# Altium PCB Bottom_boaard.PcbDoc
Units mm, origin at the board's own origin, x right, y up, seen from the top; angles counter-clockwise.
Board outline 102.5 x 86.6 mm, 2 copper layers (Top Layer, Bottom Layer); 42 components, 42 nets, 163 pads, 28 vias.
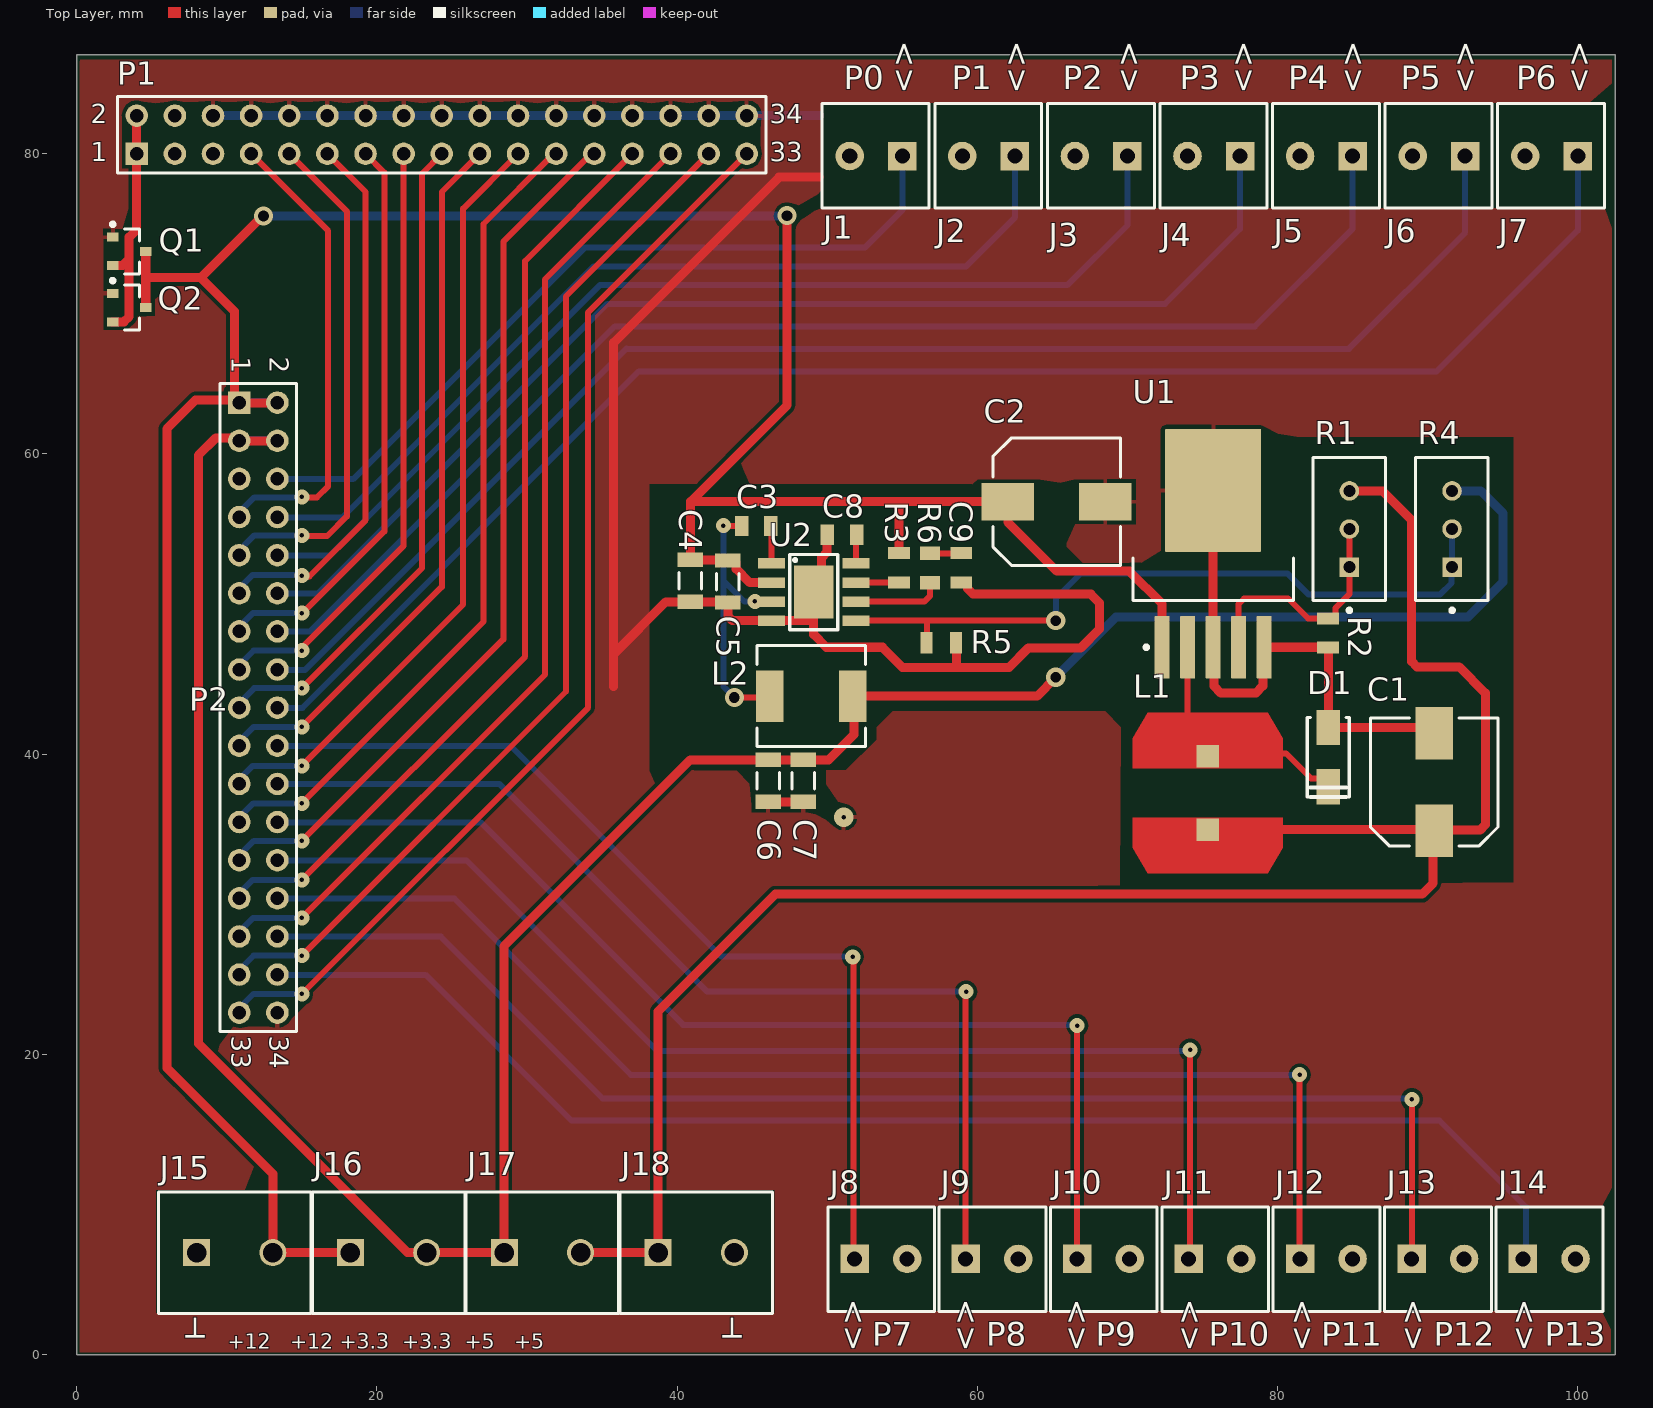
[diagram p0: Top Layer view]
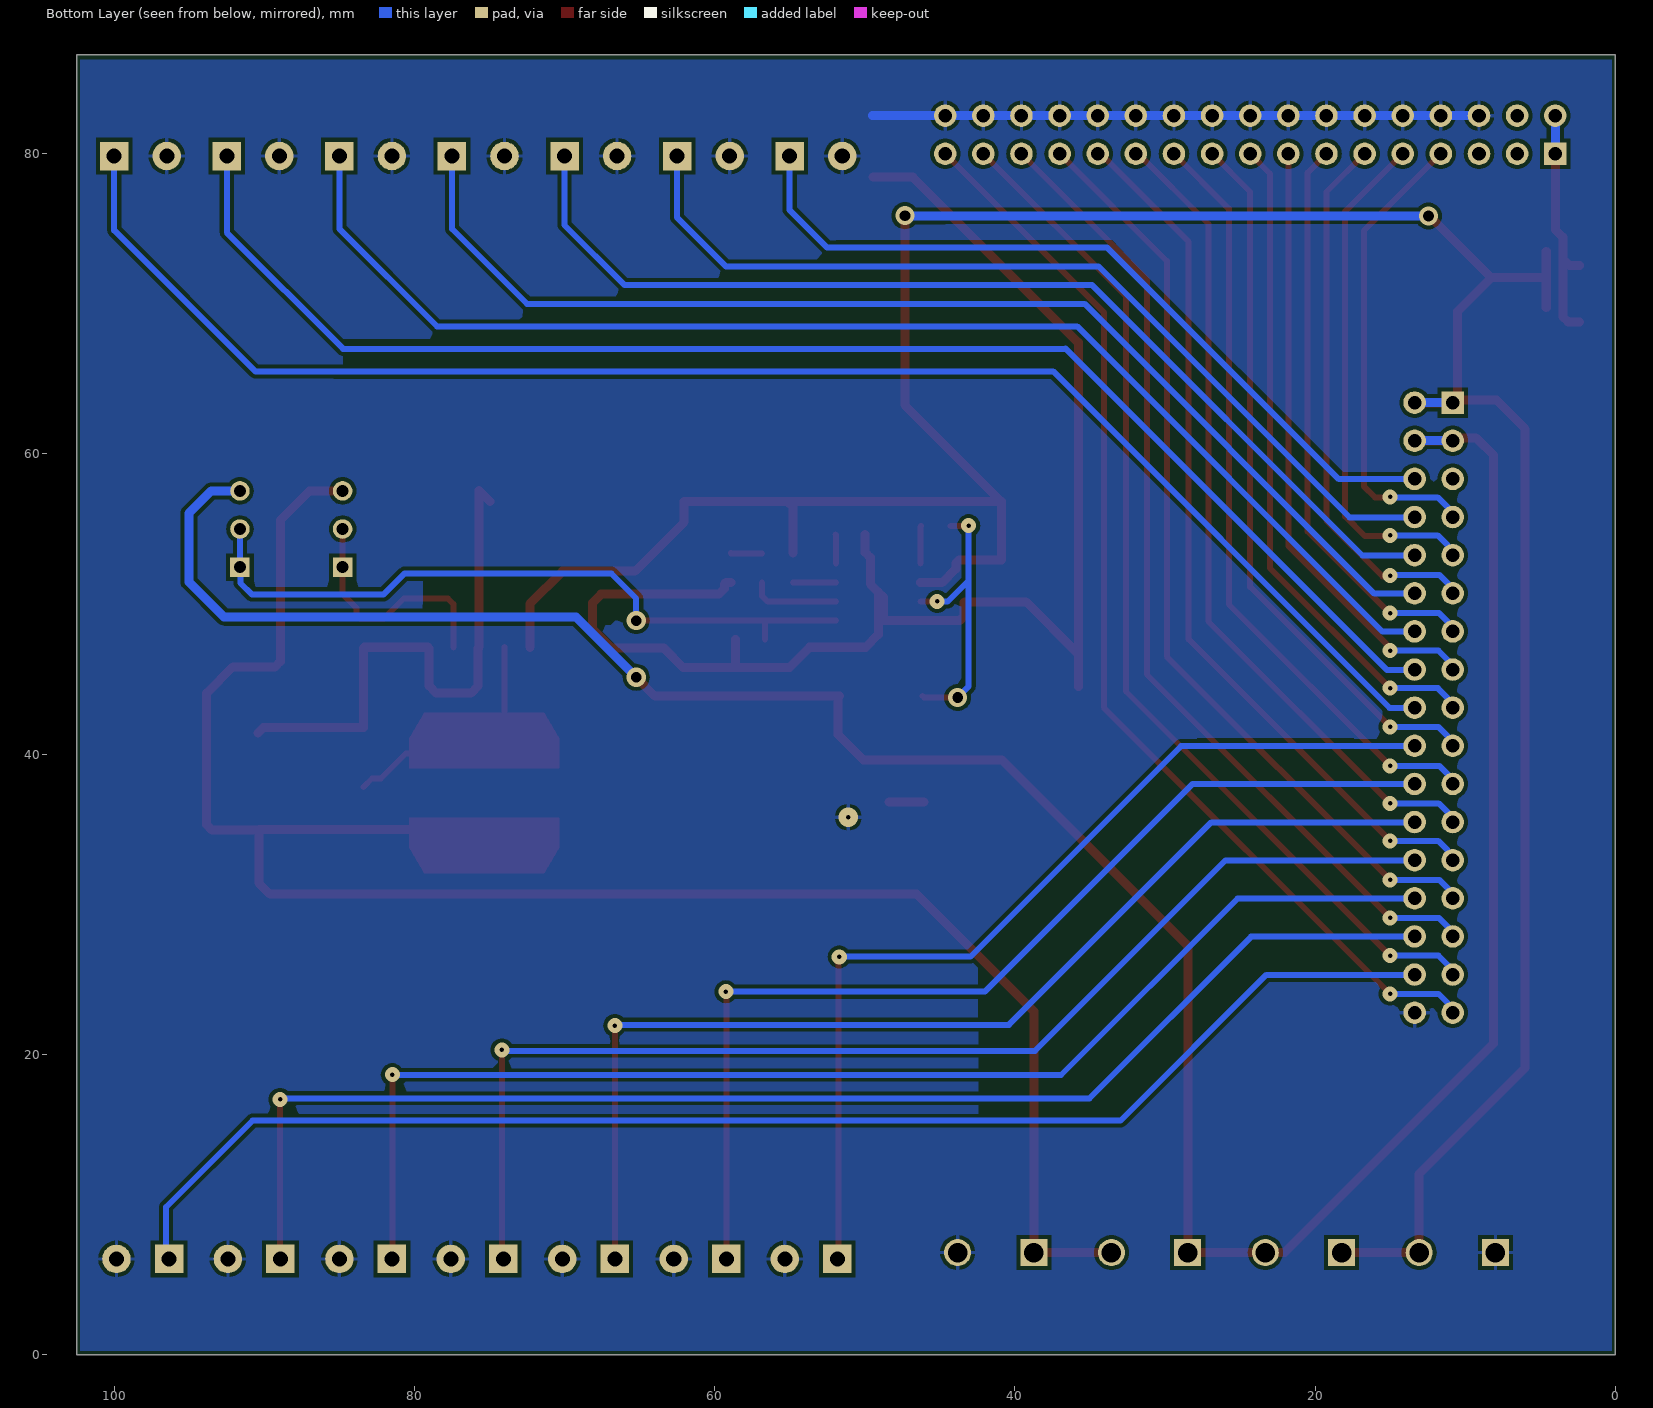
[diagram p1: Bottom Layer view, seen from below]
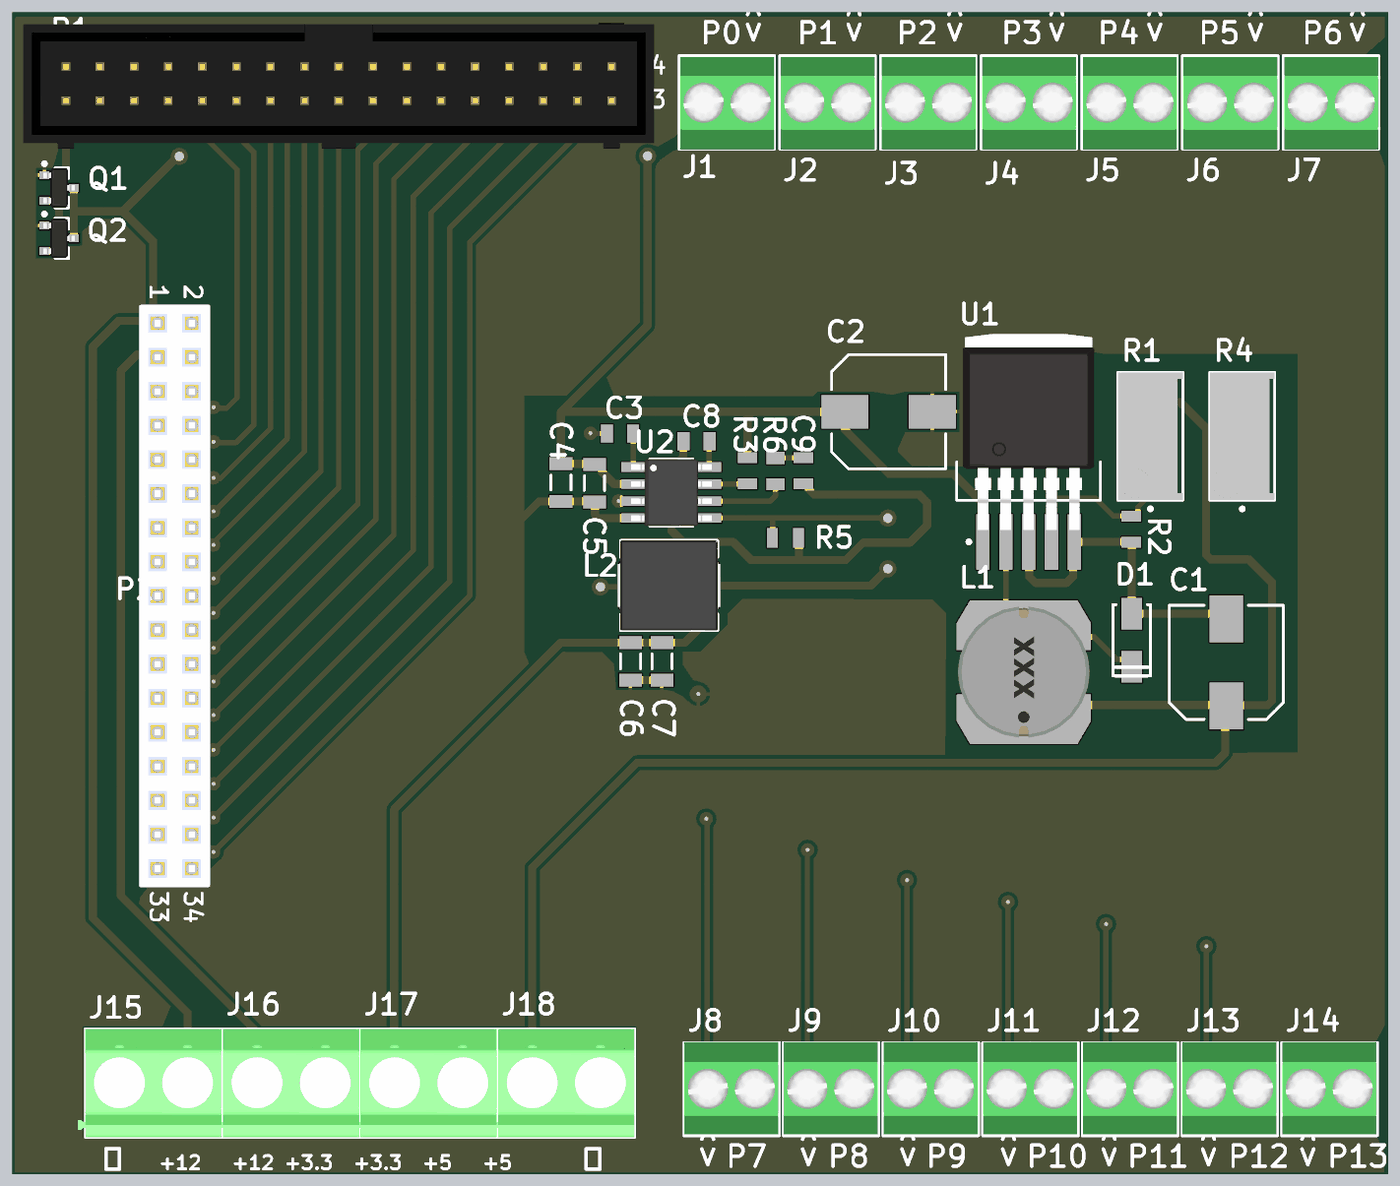
[diagram p2: 3D render of the assembled board from above, using the file's embedded part models]

## Layer stack, top to bottom
Top Solder: solder mask 0.0102, Solder Resist, Dk 3.5
Top Layer: signal copper 0.0356
Dielectric 1: dielectric 0.32, FR-4, Dk 4.8
Bottom Layer: signal copper 0.0356
Bottom Solder: solder mask 0.0102, Solder Resist, Dk 3.5

## Board outline
0,0 102.5,0 102.5,86.6 0,86.6

## Design rules (kind name [scope] priority, off if disabled: settings)
Clearance [All] p1: gap=0.254 ignorepadtopadclearanceinfootprint=FALSE except(0: Arc-Hole Track-Hole SMDPad-Hole THPad-Hole Via-Hole Fill-Hole Poly-Hole Region-Hole Text-Hole)
PolygonConnect [All] p1: connectstyle=Relief reliefconductorwidth=0.254 reliefentries=4 polygonreliefangle="90 Angle" airgapwidth=0.254
RoutingVias [All] p1: holewidth=0.711 width=1.27 viastyle="Through Hole" minholewidth=0.711 minwidth=1.27 maxholewidth=0.711 maxwidth=1.27
SolderMaskExpansion [All] p1: expansion=0.102
Width VCC [InNet('VCC')] p1: maxlimit=1 minlimit=0.6 preferedwidth=0.8 minimp=50.000000 maximp=50.000000 favimp=50.000000
Width +5 [InNet('+5')] p2: maxlimit=1 minlimit=0.6 preferedwidth=0.8 minimp=50.000000 maximp=50.000000 favimp=50.000000
Width +3.3 [InNet('+3.3')] p3: maxlimit=1 minlimit=0.6 preferedwidth=0.8 minimp=50.000000 maximp=50.000000 favimp=50.000000
Width +12 [InNet('+12')] p4: maxlimit=1 minlimit=0.6 preferedwidth=0.8 minimp=50.000000 maximp=50.000000 favimp=50.000000
Width GND [InNet('GND')] p5: maxlimit=1 minlimit=0.6 preferedwidth=0.8 minimp=50.000000 maximp=50.000000 favimp=50.000000
Width Width_1 [All] p6: maxlimit=0.4 minlimit=0.254 preferedwidth=0.3 minimp=50.000000 maximp=50.000000 favimp=50.000000
30 further rules are at their usual default settings.

## Classes and differential pairs
component class Power: C1 C2 C3 C4 C5 C6 C7 C8 C9 D1 L1 L2 Q1 Q2 R1 R2 R3 R4 R5 R6 U1 U2
component class Bottom_board: J1 J2 J3 J4 J5 J6 J7 J8 J9 J10 J11 J12 J13 J14 J15 J16 J17 J18 P1 P2

## Components (designator, comment, footprint, x,y, rotation, side; value= is the part's Value field where it differs from the comment)
C1 "CAP_ELEC_SMD" ECAP_SMD_8mmx10mm 90.434,38.15 r90 top
C2 "CAP_ELEC_SMD" ECAP_SMD_8mmx10mm 65.284,56.825 r0 top
C3 "CAP_SMD" CAP0805 45.275,55.2 r180 top
C4 "CAP_SMD" CAPC1206(3216)170_L 40.875,51.55 r90 top
C5 "CAP_SMD" CAPC1206(3216)170_L 43.375,51.5 r90 top
C6 "CAP_SMD" CAPC1206(3216)170_L 46.055,38.225 r90 top
C7 "CAP_SMD" CAPC1206(3216)170_L 48.4,38.225 r90 top
C8 "CAP_SMD" CAP0805 50.975,54.625 r0 top
C9 "CAP_SMD" CAP0805 56.85,52.4 r270 top
D1 "SS34" DO-214 83.384,39.8 r90 top
J1 "" KF350-3.5-02P 55,79.85 r180 top
J2 "" KF350-3.5-02P 62.5,79.85 r180 top
J3 "" KF350-3.5-02P 70,79.85 r180 top
J4 "" KF350-3.5-02P 77.5,79.85 r180 top
J5 "" KF350-3.5-02P 85,79.85 r180 top
J6 "" KF350-3.5-02P 92.5,79.85 r180 top
J7 "" KF350-3.5-02P 100,79.85 r180 top
J8 "" KF350-3.5-02P 51.825,6.375 r0 top
J9 "" KF350-3.5-02P 59.225,6.375 r0 top
J10 "" KF350-3.5-02P 66.65,6.375 r0 top
J11 "" KF350-3.5-02P 74.075,6.375 r0 top
J12 "" KF350-3.5-02P 81.5,6.375 r0 top
J13 "" KF350-3.5-02P 88.925,6.375 r0 top
J14 "" KF350-3.5-02P 96.35,6.375 r0 top
J15 "" PHOE-1729128-2_V 10.525,6.8 r0 top
J16 "" PHOE-1729128-2_V 20.775,6.8 r0 top
J17 "" PHOE-1729128-2_V 31.025,6.8 r0 top
J18 "" PHOE-1729128-2_V 41.275,6.8 r0 top
L1 "" SDR1006_SMD 75.35,37.425 r0 top
L2 "Inductor power" IHLP2525 48.925,43.875 r0 top value=10uH
P1 "Header 17X2" HDR2X17 4,80 r0 top
P2 "Header 17X2" HDR2X17-PBD 12.1,43.1 r270 top
Q1 "IRLML2502" SOT23_L 3.5,73.5 r0 top
Q2 "IRLML2502" SOT23_L 3.5,69.75 r0 top
R1 "3296W" BOUR-3296W 84.784,55 r90 top value=10K
R2 "RES_SMD" RES0805 83.359,48.075 r90 top
R3 "RES_SMD" RES0805 54.775,52.425 r90 top
R4 "3296W" BOUR-3296W 91.625,55 r90 top value=10K
R5 "RES_SMD" RES0805 57.6,47.425 r180 top
R6 "RES_SMD" RES0805 58.925,52.425 r90 top
U1 "LM2596SX-ADJ" KTT0005B_N 75.709,53.375 r90 top
U2 "MP2307" SOIC8N 49.1,50.8 r0 top

## Footprints (in the part's own frame and the unit in brackets; to place one, negate y for a bottom-side part, rotate by r counter-clockwise, add the part's x,y. Pads: shape width x height; smd on the part's side, far side on the other; paste and mask are expansions set on the pad)
BOUR-3296W [mm] "THD, 3-Leads, Body 9.53x4.83mm, Pitch 2.54mm"
  rect 1.3x1.3 hole 0.8: 1(-2.54,0)
  round 1.3 hole 0.8: 2(0,0) 3(2.54,0)
  silkscreen extent -5.54,-2.41 4.77,2.42, body extent -4.76,-2.4 4.76,2.42, height 11.55
CAP0805 [mm] "Chip Capacitor, 2-Leads, Body 2,00x1,20mm, IPC Medium Density"
  rect 0.9x1.35 smd: 1(-0.975,0) 2(0.975,0)
  body extent -1,-0.6 1,0.6, height 0.4
CAPC1206(3216)170_L [mm] "Chip Capacitor, Body 3.2x1.6mm, Height 1.7mm, IPC High Density"
  rect 0.95x1.7 smd: 1(-1.4,0) 2(1.4,0)
  silkscreen extent -0.55,-0.75 0.55,0.75, body extent -1.7,-0.9 1.7,0.9, height 1.7
DO-214 [mm] "Molded Diode, 2-Leads, Body 5,10x2,67mm, IPC Medium Density"
  rect 2.35x1.55 smd: 1(-1.975,0) 2(1.975,0)
  silkscreen extent -2.65,-1.4 2.65,1.4, body extent -2.64,-1.4 2.64,1.39, height 2.2
ECAP_SMD_8mmx10mm [mm] "Aluminum Electrolytic Capacitor, Diameter 8mm, Height 10.8mm, Pitch 6.5mm"
  rect 3.5x2.5 smd: 1(-3.25,0) 2(3.25,0)
  silkscreen extent -4.25,-4.25 4.25,4.25, body extent -3.99,-3.97 3.99,4, height 10.8
HDR2X17 [mm] "Connector; Header; 17x2 Position"
  rect 1.5x1.5 hole 0.9: 1(0,0)
  round 1.5 hole 0.9: 2(0,2.54) 3(2.54,0) 4(2.54,2.54) 5(5.08,0) 6(5.08,2.54) 7(7.62,0) 8(7.62,2.54) 9(10.16,0) 10(10.16,2.54) 11(12.7,0) 12(12.7,2.54) 13(15.24,0) 14(15.24,2.54) 15(17.78,0) 16(17.78,2.54) 17(20.32,0) 18(20.32,2.54) 19(22.86,0) 20(22.86,2.54) 21(25.4,0) 22(25.4,2.54) 23(27.94,0) 24(27.94,2.54) 25(30.48,0) 26(30.48,2.54) 27(33.02,0) 28(33.02,2.54) 29(35.56,0) 30(35.56,2.54) 31(38.1,0) 32(38.1,2.54) 33(40.64,0) 34(40.64,2.54)
  silkscreen extent -1.27,-1.27 41.91,3.81, body extent -3.17,-3.56 43.82,5.81, height 9.27
HDR2X17-PBD [mm] "Connector; Header; 17x2 Position"
  rect 1.5x1.5 hole 0.9: 1(-20.32,-1.27)
  round 1.5 hole 0.9: 2(-20.32,1.27) 3(-17.78,-1.27) 4(-17.78,1.27) 5(-15.24,-1.27) 6(-15.24,1.27) 7(-12.7,-1.27) 8(-12.7,1.27) 9(-10.16,-1.27) 10(-10.16,1.27) 11(-7.62,-1.27) 12(-7.62,1.27) 13(-5.08,-1.27) 14(-5.08,1.27) 15(-2.54,-1.27) 16(-2.54,1.27) 17(0,-1.27) 18(0,1.27) 19(2.54,-1.27) 20(2.54,1.27) 21(5.08,-1.27) 22(5.08,1.27) 23(7.62,-1.27) 24(7.62,1.27) 25(10.16,-1.27) 26(10.16,1.27) 27(12.7,-1.27) 28(12.7,1.27) 29(15.24,-1.27) 30(15.24,1.27) 31(17.78,-1.27) 32(17.78,1.27) 33(20.32,-1.27) 34(20.32,1.27)
  silkscreen extent -21.59,-2.54 21.59,2.54, body extent -21.59,-2.54 21.59,2.54, height 8.4
IHLP2525 [mm] "SMD, 2-Leads, Body 7.24x6.72mm"
  rect 1.83x3.43 smd: 1(-2.77,0) 2(2.77,0)
  silkscreen extent -3.62,-3.36 3.62,3.36, body extent -3.84,-3.36 3.84,3.36, height 3
KF350-3.5-02P [mm]
  rect 1.9x1.9 hole 1 mask+0.102: 1(0,0)
  round 1.9 hole 1 mask+0.102: 2(3.5,0)
  silkscreen extent -1.79,-3.51 5.33,3.45, body extent -1.75,-3.4 5.25,3.5, height 8.8
KTT0005B_N [mm] "DPAK, 5-Leads, Body 10.65x9.65mm, Pitch 1.7mm, IPC Medium Density"
  rrect10% 4.15x1 smd: 1(-6.25,3.4) 2(-6.25,1.7) 3(-6.25,0) 4(-6.25,-1.7) 5(-6.25,-3.4)
  rrect2% 8.2x6.4 smd: 6(4.2,0)
  silkscreen extent -6.37,-5.35 -0.3,5.35, body extent -5.36,-4.91 9.24,4.91, height 4.22
PHOE-1729128-2_V [mm] "Receptacle, 2-Leads, Body 8.1x10.16mm, Pitch 5.08mm"
  rect 1.8x1.8 hole 1.3: 1(-2.54,0)
  round 1.8 hole 1.3: 2(2.54,0)
  silkscreen extent -5.08,-4.05 5.08,4.05, body extent -5.65,-4.05 5.08,4.05, height 10.01
RES0805 [mm] "Chip Resistor, 2-Leads, Body 2,00x1,20mm, IPC Medium Density"
  rect 0.8x1.45 smd: 1(-0.975,0) 2(0.975,0)
  body extent -1,-0.6 1,0.6, height 0.4
SDR1006_SMD [mm] "SMD, 2-Leads, Body 9.8x9.8mm"
  rect 1.5x1.5 smd: 1(0,2.45) 2(0,-2.45)
  Top Layer region: -5,1.65 -5,3.65 -4,5.35 4,5.35 5,3.65 5,1.65
  Top Layer region: 5,-1.65 5,-3.65 4,-5.35 -4,-5.35 -5,-3.65 -5,-1.65
  body extent -4.9,-4.89 4.9,4.89, height 5.93
SOIC8N [mm]
  rect 1.8x0.7 smd: 1(-2.825,1.905) 2(-2.825,0.635) 3(-2.825,-0.635) 4(-2.825,-1.905) 5(2.825,-1.905) 6(2.825,-0.635) 7(2.825,0.635) 8(2.825,1.905)
  rect 2.62x3.51 smd: 4(0,0)
  silkscreen extent -1.6,-2.5 1.6,2.5, body extent -3,-2.5 3,2.5, height 1.75
SOT23_L [mm] "SOT23, 3-Leads, Body 2.9x1.3 mm, Pitch 0.95 mm, IPC High Density"
  rect 0.75x0.6 smd: 1(-1.1,0.95) 2(-1.1,-0.95) 3(1.1,0)
  silkscreen extent -1.22,-1.5 0.7,1.92, body extent -1.17,-1.46 1.17,1.46, height 1

## Part data
C1 C2: Rated Capacitance=220uF, Rated Voltage=35V
C3 C4 C5 C6 C7 C8 C9: "Ceramic capacitor, 0805"
  C3: Val=10nF
  C4 C5: Val=10uF
  C6 C7: Val=22uF
  C8: Val=100nF
  C9: Val=3.9nF
D1: "Schottky Rectifier"
J1 J2 J3 J4 J5 J6 J7 J8 J9 J10 J11 J12 J13 J14: library part Terminal_2, "Euro Terminal Block, 6 A, 150 V, -40 to 105 degC, Pitch 2.54 mm, 1x2 Position, Height 8.6 mm, Tail Length 3.3 mm", Color=Green, Contact Resistance="20 mOhm", Insulation Resistance="5000 MOhm / 1000 V", Manufacturer="Cixi KaiFeng", PartNumber=KF120-02P-14, Rated Current="6 A", Rated Voltage="150 V", Temp. Range="-40 to 105 degC", Withstanding Voltage="AC 1500 V / 1 Min", ComponentLink1Description="Manufacturer URL", ComponentLink1URL=http://www.nb-kaifeng.com/, ComponentLink2Description=Datasheet, ComponentLink2URL=http://www.nb-kaifeng.com/upload/editor/ext_pdf/201305290533202245.pdf, Contact=Brass, Mounting Technology="Through Hole", No. of Pole=2, PackageDescription="Terminal Block, Pitch 2.54 mm, 1 x 2 Position, Height 8.6 mm, Tail Length 3.3 mm", PackageReference=KF120-2, Pitch="Single Pitch"
J15 J16 J17 J18: library part Terminal_2_Green, "PCB Terminal Block, 13.5 A, 400 V, 2-Pin THD, RoHS, Bulk", Current Rating=13500mA, Manufacturer="Phoenix Contact", Package Description="2-Pin Through Hole Device, Body 8.1 x 10.16 mm, Pitch 5.08 mm", Package Reference=1729128-2, Package Version=03/2015, PartNumber=1729128, Voltage Rating=400V, Datasheet URL=https://datasheet.ciiva.com/16046/1729128-16046181.pdf, Datasheet Version=12/2013, Manufacturer URL=http://www.phoenixcontact.com/, Mounting Technology=ThroughHole, No. of Positions=2, No. of Rows=1, Orientation=Horizontal, Package URL=https://www.phoenixcontact.com/online/portal/pi/pxc/product_detail_page/!ut/p/b1/3VdJjqNKFDxLH8AFycySyWY2ozFsEPOMMQaDOX1XedGL_1Vdm5YXJleknhSKeBkvI6EA8ncAo3AYoDhBQGco6KN7VURTdemj9us_IEKEZo_YHiPAEWEFmDGOHMORkqKYCORBZxgL7ZoaZYcbFFUZ3fqxSY6GOuxydWUuHqz1ynmMFygu583Bob0Ewr6Sd_l-5m-kAueHiB0jpRwZwe58wwtkpxtMYd_LmGcDRU02dRNEyWt6Y2ti5pSyJ_reIkzIulrqApdnbT11V5jnCKbYNCvhEM1MCpPByat_X379-iThf08CI5GfOPqfBeS3BRoBOdD55AKVv0iLwCMq-2BrzXWSGRH7pUGD9uwXQjiph3xL0DKQwdGa0JImiIOmBNOestqgwTHSSs2oOep-78apyXQBvNi8ZLaFjvjWvcaUEBu0MC6Wbe-d6mB0FAebo2lUWinqYaZs5DAYzV0RP9yitUjnGJ0iI9xhZkT42OCQNUJJhkgWINNQLP2JFP6OpMg3JCVg70jqHT0lvKOnhHf0lPuOnnLf0VPuWx6_dxwUIvwk5WMkT0kLL1mh61l2yZVSzG3pYV_bqo-mj6uMKwKwdnnW8Jh5RTOJzMOA5c-eJDaZQw4mTMPH02PvS_ZAqNVjVTo2WyYLkwH_KU1mmmG5kjRhDqPXLwwVHvVOjCM60-fpXvTDfMGW1PVFVS1r4e4yVDk4ZdNbkUHvqPqQSeian4UD39fNKmachqdJ1NJbyk8rXT9mXTvPk3oE5meulKGgiruPJek-4I9hTT6G8ZLOyRSm2RRVbThERQad5OS28hdt4YW4vG0stgYYzsWsK4_7y6DZMjJSCqri1kyiZR5vD7pwIrNR7QwPHTcLTI5qT7eRlpHrdGiupYlqQDJ7zy_CND8fWWBoLRXxk1RVcXiBQwbTD4Xi7KL-FuO94t9xaqweXzH, Packing=Bulk, Pitch=5.08mm, RoHS=TRUE
L1: library part "Inductor power", "Inductor for Power Circuits", Current - Saturation=2.62A, DC Resistance (DCR)=43mOhmMax, Frequency - Test=100kHz, Inductance=33uH, Manufacturer=TDK, Operating Temperature=-40°C~105°C, Package / Case=Nonstandard, Package Description="2-Pin Surface Mount Device, Body 5 x 5 mm", Package Reference=VLCF5020T-3, Standard Package=1, Tolerance=±30%, Catalog Drawings=VLCF50[20,20-(1,3),28-2]SeriesTopVLCF50[20,20-(1,3),28-2]SeriesFootprintVLCF50[20,20-(1,3)]SeriesSide, Category=Inductors,Coils,Chokes, Current Rating=2.62A, Datasheet URL=https://product.tdk.com/info/en/catalog/datasheets/inductor_commercial_power_vlcf5020-3_en.pdf, Datasheet Version=04/2016, EDA / CAD Models=DownloadfromAcceleratedDesigns, Family=FixedInductors, Height - Seated (Max)="0.079\"(2.00mm)", Manufacturer URL=http://www.tdk.com/, Material - Core=Ferrite, Mounting Technology=SurfaceMount, Mounting Type=SurfaceMount, Online Catalog=VLCFSeries, Other Names=445-4557-1, Packaging=CutTape(CT), Series=VLCF, Shielding=Shielded, Size / Dimension="0.197\"Lx0.197\"W(5.00mmx5.00mm)", Type=Wirewound
L2: "Inductor for Power Circuits"
P1 P2: "Header, 17-Pin, Dual row", LatestRevisionDate=17-Jul-2002, LatestRevisionNote="Re-released for DXP Platform.", Publisher="Altium Limited"
Q1 Q2: "N-Channel HEXFET(R) Power MOSFET, 20 V VDS, +/- 12 V VGS, 4.2 A, 3-Pin SOT23, RoHS, Tape and Reel", Drain-Source On Resistance-Max=0.045O, Drain-to-Source Voltage [Vdss]=20V, Manufacturer="International Rectifier", Package Description="3-Pin Small Outline Transistor, Body 2.92 x 1.3 mm, Pitch 0.95 mm", Package Reference=SOT-23-3, Rated Power Dissipation=1.25W, Channel Type=N-Channel, Datasheet URL=https://datasheet.ciiva.com/6383/irlml2502pbf-6383216.pdf, Datasheet Version=Apr-14, Manufacturer URL=http://internationalrectifier.com/, Qg Gate Charge=8nC
R1 R4: library part Potentiometer, "3296 - 3/8 ” Square Trimpot(R) Trimming Potentiometer,, +/- 10%, 0.5 W, -55 to 125 degC, 3-Pin THD, RoHS, Tube"
U1: "SIMPLE SWITCHER® Power Converter 150 KHz 3A Step-Down Voltage Regulator, 5-pin TO-263", Manufacturer="Texas Instruments", PackageTopMarking="NSUZXYTTE#*LM2596S*-ADJ P+", PowerWise=N, Code_JEDEC=MO-169-AB, ComponentLink1Description="Datasheet URL", ComponentLink1URL=http://www.ti.com/general/docs/lit/getliterature.tsp?genericPartNumber=LM2596&fileType=pdf, CompType=Switcher, PackageDescription="TO-263, Molded, .400 x .390 x .180in, 5 Lead, .067in Pitch, Surface Mount", PackageReference=KTT0005B, PinCount=5, RoHS=N
U2: "Monolithic synchronous buck regulator"
R2: Val=470
R3: Val=100K
R5: Val=10K
R6: Val=6.8K

## Via types
v1: diameter 1, hole 0.3, Top Layer to Bottom Layer, tented both sides, 22 vias
v2: diameter 1.27, hole 0.711, Top Layer to Bottom Layer, tented both sides, 5 vias
v3: diameter 1.27, hole 0.3, Top Layer to Bottom Layer, tented both sides, 1 vias

## Nets (pads, with @x,y where several pads share a name; then routed paths per layer and width w, separated by ;. In a path a pad name is that pad's centre, name@x,y a point inside that pad or via, vN(x,y) a via of type N, cw(c..) or ccw(c..) an arc to the next point about the centre after c; other vN are vias at no path point)
+3.3: C6.2 C7.2 J16.2 J17.1 L2.2 P2.3 P2.4 R4.3 | length 180.9
  Top Layer w0.6: P2.3 P2.4 ; P2.3@10.83,61.08 9.28,61.08 8.1,59.9 8.1,20.74 22.04,6.8 J16.2 J17.1@28.45,6.8 ; v2(65.225,45.125) 63.975,43.875 L2.2 51.775,43.795 51.775,41.3 50.1,39.625 C7.2 C6.2 40.875,39.625 28.45,27.2 J17.1@28.45,6.835 ; J17.1@28.45,6.8 J17.1@28.45,6.835 ; J17.1@28.45,6.8 J17.1 J17.1@28.45,6.835
  Bottom Layer w0.6: P2.3@10.885,60.9 P2.4@13.425,60.9 ; v2(65.225,45.125) 69.225,49.125 92.675,49.125 95.025,51.475 95.025,56.05 93.535,57.54 R4.3
+5: C1.1 J17.2 J18.1 L1.2 R1.3 | length 127.6
  Top Layer w0.6: J17.2 J18.1 38.735,22.86 46.55,30.675 89.625,30.675 90.359,31.409 C1.1@90.359,34.975 ; L1.2 C1.1@90.359,34.975 ; R1.3 86.985,57.54 88.925,55.6 88.925,46.176 89.276,45.825 92.1,45.825 93.85,44.075 93.85,35.301 93.499,34.95 90.384,34.95 C1.1@90.359,34.975
+12: C2.1 C4.2 C5.2 J15.2 J16.1 P2.1 P2.2 Q1.3 Q2.3 R3.2 U1.1 U2.2 | length 204.3
  Top Layer w0.6: Q2.3 4.6,71.75 ; Q1.3 4.6,71.75 ; P2.1@10.5,63.4 P2.2@13.04,63.4 ; v2(12.45,75.85) 12.35,75.85 8.25,71.75 ; J15.2@13.065,6.375 J15.2 ; J16.1 J15.2 ; U2.2 44.84,51.435 43.925,52.35 43.925,52.725 43.7,52.95 C4.2 40.875,56.8 40.9,56.825 ; 46.475,56.825 40.9,56.825 ; 46.475,56.825 55.15,56.825 ; v2(47.325,75.875) 47.325,63.25 40.9,56.825 ; R3.2 54.775,56.45 55.15,56.825 ; U1.1 72.309,50.016 70.125,52.2 65.3,52.2 62.034,55.466 C2.1 55.15,56.825 ; 4.6,71.75 8.25,71.75 ; 8.25,71.75 10.5,69.5 10.5,63.6 7.928,63.6 6,61.672 6,19.1 13.065,12.035 J15.2
  Bottom Layer w0.6: P2.1 P2.2 ; v2(12.45,75.85) 44.615,75.85 ; 44.64,75.85 v2@47.325,75.85
GND: C1.2 C2.2 C4.1 C5.1 C6.1 C7.1 C8.1 D1.2 J1.2 J2.2 J3.2 J4.2 J5.2 J6.2 J7.2 J8.2 J9.2 J10.2 J11.2 J12.2 J13.2 J14.2 J15.1 J18.2 P1.6 P1.8 P1.10 P1.12 P1.14 P1.16 P1.18 P1.20 P1.22 P1.24 P1.26 P1.28 P1.30 P1.32 P1.34 P2.34 Q1.1 Q2.1 R2.1 R5.1 R6.1 U1.3 U1.5 U1.6 U2.4 | length 180.2
  Top Layer w0.6: 35.775,44.525 35.775,46.675 ; C6.1 C7.1 ; 49.45,78.45 46.8,78.45 35.775,67.425 35.775,46.675 ; C8.1 49.976,54.601 49.976,53.451 49.628,53.103 49.628,51.328 U2.4@49.1,50.8 ; R5.1@58.6,47.65 58.6,45.8 58.625,45.775 ; R6.1 59.25,51.45 59.35,51.35 59.35,51.025 59.716,50.659 67.556,50.659 68.15,50.065 68.15,48.35 66.875,47.075 63.4,47.075 62.1,45.775 58.625,45.775 ; U1.6@74.959,56.825 U1.6 U1.3 75.751,47.083 75.751,44.549 76.225,44.075 78.55,44.075 79.025,44.55 79.025,47.041 U1.5 83.334,47.125 R2.1 83.384,47.075 D1.2 90.059,41.775 C1.2 ; 35.775,46.675 39.25,50.15 C4.1 43.325,50.15 C5.1 43.4,50.075 43.4,49.175 43.68,48.895 46.275,48.895 48.748,48.895 48.748,50.448 U2.4@49.1,50.8 ; U2.4@49.1,50.8 49.1,47.975 49.95,47.125 53.675,47.125 55.025,45.775 58.625,45.775
  Bottom Layer w0.6: P1.6 P1.8 P1.10 P1.12 P1.14 P1.16 P1.18 P1.20 P1.22 P1.24 P1.26 P1.28 P1.30 P1.32 P1.34 49.499,82.54
  other v3: 51.1,35.8
NetC3_1: C3.1 U2.1 | length 2.5
  Top Layer w0.4: C3.1 46.275,55.175 U2.1
NetC3_2: C3.2 L2.1 U2.3 | length 19.2
  Top Layer w0.4: v1(43.075,55.225) 43.1,55.2 C3.2 ; v2(43.815,43.775) 46.055,43.775 L2.1 ; v1(45.175,50.175) 45.185,50.165 U2.3
  Bottom Layer w0.4: v1(43.075,55.225) 43.075,51.575 ; v2(43.815,43.775) 43.075,44.515 43.075,51.575 ; v1(45.175,50.175) 44.475,50.175 43.075,51.575
NetC8_2: C8.2 U2.8 | length 1.9
  Top Layer w0.4: U2.8 51.925,54.6 C8.2
NetC9_1: C9.1 R6.2 | length 2.1
  Top Layer w0.4: C9.1 58.9,53.375 R6.2
NetC9_2: C9.2 U2.6 | length 6
  Top Layer w0.4: U2.6 56.465,50.165 56.85,50.55 C9.2
NetD1_1: D1.1 L1.1 U1.2 | length 16.8
  Top Layer w0.4: U1.2 74.009,41.216 L1.1 75.525,40.05 80.575,40.05 82.243,38.382 82.827,38.382 D1.1
NetR1_1: R1.1 R1.2 R2.2 U1.4 | length 16.2
  Top Layer w0.4: U1.4 77.409,50.009 77.775,50.375 80.7,50.375 82.025,49.05 R2.2 83.654,49.05 83.854,49.25 83.854,49.729 84.784,50.659 R1.1 R1.2
NetR3_1: R3.1 U2.7 | length 2.9
  Top Layer w0.4: U2.7 51.94,51.45 R3.1
NetR4_1: R4.1 R4.2 R5.2 U2.5 | length 47.4
  Top Layer w0.4: U2.5 56.75,48.895 ; R5.2@56.65,47.65 56.65,48.795 56.75,48.895 ; v2(65.225,48.9) 65.15,48.9 65.145,48.895 56.75,48.895
  Bottom Layer w0.4: v2(65.225,48.9) 65.225,50.375 66.875,52.025 80.675,52.025 82.05,50.65 90.835,50.65 91.585,51.4 91.585,52.42 R4.1 R4.2@91.625,54.845
P0: P1.33 P2.33 | length 73.3
  Top Layer w0.4: v1(15,24.025) 34.075,43.1 34.075,69.435 P1.33
  Bottom Layer w0.4: P2.33@10.5,22.76 11.765,24.025 v1(15,24.025)
P1: P1.31 P2.31 | length 69.7
  Top Layer w0.4: v1(15,26.575) 32.6,44.175 32.6,70.5 P1.31
  Bottom Layer w0.4: P2.31@10.5,25.3 11.775,26.575 v1(15,26.575)
P2: P1.29 P2.29 | length 66.1
  Top Layer w0.4: v1(15,29.1) 31.2,45.3 31.2,71.64 P1.29
  Bottom Layer w0.4: P2.29@10.5,27.84 11.76,29.1 v1(15,29.1)
P3: P1.27 P2.27 | length 62.5
  Top Layer w0.4: v1(15,31.625) 29.875,46.5 29.875,72.855 P1.27
  Bottom Layer w0.4: P2.27@10.5,30.405 11.72,31.625 v1(15,31.625)
P4: P1.25 P2.25 | length 59
  Top Layer w0.4: v1(15,34.225) 28.425,47.65 28.425,74.15 34.275,80 P1.25
  Bottom Layer w0.4: P2.25@10.5,32.92 11.805,34.225 v1(15,34.225)
P5: P1.23 P2.23 | length 55.4
  Top Layer w0.4: v1(15,36.725) 27.1,48.825 27.1,75.325 31.775,80 P1.23
  Bottom Layer w0.4: P2.23@10.5,35.46 11.765,36.725 v1(15,36.725)
P6: P1.21 P2.21 | length 51.7
  Top Layer w0.4: v1(15,39.225) 25.75,49.975 25.75,76.35 P1.21
  Bottom Layer w0.4: P2.21@10.5,38 11.725,39.225 v1(15,39.225)
P7: P1.7 P2.7 | length 31.4
  Top Layer w0.4: P1.7 16.75,74.87 16.75,57.85 16,57.1 v1@15,57.1
  Bottom Layer w0.4: P2.7@10.5,55.78 11.836,57.116 v1@14.966,57.116
  other v1: 15,57.15
P8: P1.9 P2.9 | length 34.3
  Top Layer w0.4: P1.9 18,76.16 18,55.85 16.676,54.526 v1@14.97,54.526
  Bottom Layer w0.4: P2.9@10.5,53.24 11.836,54.576 v1@14.97,54.576
  other v1: 15,54.576
P9: P1.11 P2.11 | length 36.3
  Top Layer w0.4: v1@15,51.85 15.51,51.85 19.25,55.59 19.25,77.45 P1.11
  Bottom Layer w0.4: P2.11@10.5,50.725 11.704,51.929 v1@14.996,51.929
  other v1: 15,51.9
P10: P1.13 P2.13 | length 38.5
  Top Layer w0.4: v1@15,49.35 20.5,54.85 20.5,78.74 P1.13
  Bottom Layer w0.4: P2.13@10.5,48.16 11.74,49.4 v1(15,49.4)
P11: P1.15 P2.15 | length 41
  Top Layer w0.4: v1@15,46.85 v1(15,46.9) 15,47.1 21.78,53.88 P1.15
  Bottom Layer w0.4: P2.15@10.5,45.62 11.78,46.9 v1(15,46.9)
P12: P1.17 P2.17 | length 44.8
  Top Layer w0.4: v1@15,44.35 v1(15,44.4) ; v1@15,44.6 v1(15,44.4) ; P1.17 23,78.68 23,52.4 v1(15,44.4)
  Bottom Layer w0.4: P2.17@10.5,43.08 11.82,44.4 v1(15,44.4)
P13: P1.19 P2.19 | length 48.1
  Top Layer w0.4: v1@14.996,41.821 24.32,51.145 24.32,77.45 26.86,79.99 P1.19
  Bottom Layer w0.4: P2.19@10.5,40.54 11.785,41.825 v1(14.996,41.825)
T1: J1.1 P2.6 | length 53
  Bottom Layer w0.4: P2.6@13.04,58.32 18.42,58.32 33.85,73.75 34.349,73.75 52.5,73.75 55,76.25 J1.1
T2: J2.1 P2.8 | length 62.3
  Bottom Layer w0.4: P2.8@13.04,55.78 17.71,55.78 34.43,72.5 35.425,72.5 ; 34.983,72.5 59.25,72.5 62.5,75.75 J2.1
T3: J3.1 P2.10 | length 70.7
  Bottom Layer w0.4: P2.10@13.04,53.24 16.84,53.24 34.85,71.25 35.575,71.25 66,71.25 70,75.25 J3.1
T4: J4.1 P2.12 | length 79.4
  Bottom Layer w0.4: P2.12@13.04,50.7 16.05,50.7 35.35,70 72.5,70 77.5,75 J4.1
T5: J5.1 P2.14 | length 87.9
  Bottom Layer w0.4: P2.14@13.04,48.16 15.51,48.16 35.85,68.5 36.55,68.5 78.5,68.5 85,75 J5.1
T6: J6.1 P2.16 | length 96.6
  Bottom Layer w0.4: P2.16@13.04,45.62 15.22,45.62 36.612,67.012 ; 36.625,67 84.75,67 92.5,74.75 J6.1
T7: J7.1 P2.18 | length 105.1
  Bottom Layer w0.4: P2.18@13.04,43.08 15.029,43.08 37.449,65.5 38.225,65.5 90.6,65.5 100,74.9 J7.1
T8: J8.1 P2.20 | length 65
  Top Layer w0.4: v1(51.7,26.5) 51.7,26.35 51.85,26.2 51.75,26.1 J8.1@51.75,6.45 ; J8.1@51.75,6.375 J8.1@51.75,6.45 ; J8.1 J8.1@51.75,6.45
  Bottom Layer w0.4: P2.20@13.04,40.54 28.935,40.54 42.95,26.525 51.75,26.525 51.775,26.5 v1(51.7,26.5)
T9: J9.1 P2.22 | length 69.7
  Top Layer w0.4: J9.1 59.225,24.15 v1(59.25,24.175)
  Bottom Layer w0.4: P2.22@13.04,38 28.175,38 42,24.175 v1(59.25,24.175)
T10: J10.1 P2.24 | length 74.8
  Top Layer w0.4: J10.1 v1(66.65,21.925)
  Bottom Layer w0.4: P2.24@13.04,35.46 26.915,35.46 40.4,21.975 66.6,21.975 v1(66.65,21.925)
T11: J11.1 P2.26 | length 80.5
  Top Layer w0.4: J11.1 J11.1@74.175,6.475 ; J11.1@74.175,6.375 J11.1@74.175,6.475 ; v1(74.175,20.3) J11.1@74.175,6.475
  Bottom Layer w0.4: P2.26@13.04,32.92 25.98,32.92 38.675,20.225 74.1,20.225 v1(74.175,20.3)
T12: J12.1 P2.28 | length 87.1
  Top Layer w0.4: J12.1@81.475,5.675 J12.1@81.475,6.4 ; v1(81.475,18.65) J12.1@81.475,6.95 ; J12.1 J12.1@81.475,6.4 ; J12.1@81.475,6.4 81.2,6.675 J12.1@81.475,6.95 ; J12.1@81.475,6.4 J12.1@81.475,6.95
  Bottom Layer w0.4: P2.28@13.04,30.38 25.17,30.38 36.925,18.625 81.45,18.625 v1(81.475,18.65)
T13: J13.1 P2.30 | length 91.1
  Top Layer w0.4: J13.1 88.9,6.4 J13.1@88.95,6.45 ; J13.1@88.95,6.375 J13.1@88.95,6.45 ; v1(88.95,17) J13.1@88.95,6.45
  Bottom Layer w0.4: P2.30@13.04,27.84 24.26,27.84 35.025,17.075 88.875,17.075 v1(88.95,17)
T14: J14.1 P2.32 | length 93.5
  Bottom Layer w0.4: P2.32@13.04,25.3 23.25,25.3 32.95,15.6 90.775,15.6 96.55,9.825 96.55,6.575 J14.1
VCC: P1.1 P1.2 Q1.2 Q2.2 | length 18.7
  Top Layer w0.6: Q2.2 3.149,68.8 3.5,69.151 3.5,73 ; Q1.2 3.05,72.55 3.5,73 ; P1.2 P1.1 4,74.95 3.5,74.45 3.5,73
  Bottom Layer w0.6: P1.1 P1.2
pads on no net: P1.3 P1.4 P1.5 P2.5

## Polygon pours and split planes (outlines as drawn)
GND on Top Layer " " (solid, remove dead copper, pour order 4): 0.2,0.15 0.2,86.15 102.2,86.15 102.2,0.15
GND on Top Layer " " (solid, remove dead copper, pour order 0): 0.25,0.25 0.25,86.25 102.25,86.25 102.25,0.25
GND on Bottom Layer (solid, pour order 2): 0.25,86.25 102.25,86.25 102.25,0.25 0.25,0.25

## Other copper
Top Layer:
  pour cut-out: 5.25,11 46.5,11 46.5,2.75 5.25,2.75
  pour cut-out: 95.75,61.143 80.45,61.15 80.5,52.765 65.951,52.742 65.995,57.956 38.15,58.022 38.15,38.9 41.112,38.938 44.84,38.9 44.816,38.023 49.931,37.976 49.95,38.938 51.25,38.938 53.3,40.95 53.299,42.874 69.575,42.85 69.502,31.259 95.75,31.448
  pour cut-out: 50,9.9 50,2.9 101.6,2.9 101.6,9.9
  pour cut-out: 49.601,83.4 49.599,76.365 101.8,76.365 101.8,83.4
  pour cut-out: 7.651,18.248 8.14,17.698 13.63,12.208 13.63,7.811 14.075,7.365 17.081,7.365 17.081,7.954 17.148,7.887 18.578,7.887 18.578,9.463 9.041,19 8.892,19
Bottom Layer:
  pour cut-out: 15.775,45.175 15.9,45.3 15.9,58.75 18.1,58.75 32,72.65 33.525,74.241 51.909,74.241 53.5,72.65 59.05,72.65 59.05,72.2 59.875,71.375 65.775,71.375 65.775,70.95 66.234,70.491 72.296,70.491 72.296,69.304 72.825,68.775 77.975,68.775 77.975,68.025 78.475,67.525 78.6,67.65 84.75,67.65 84.75,65.625 85.366,65.009 35.803,65.009
  pour cut-out: 66.375,51.675 66.45,51.75 79.425,51.75 79.425,49.75 79.45,49.725 78.35,48.625 66.925,48.625 65.625,49.925
  pour cut-out: 17.418,41.05 27.845,41.05 42.775,26.12 42.425,25.77 42.425,15.65 33.025,15.65 23.615,25.06 17.311,25.06

## Silkscreen, mask and mechanical layers (free items; w line width, h text height)
Top Overlay:
  text "P0" at 51.1,84.3 h1.57
  text "P1" at 58.3,84.3 h1.57
  text "P2" at 65.7,84.3 h1.57
  text "P3" at 73.5,84.3 h1.57
  text "P4" at 80.7,84.3 h1.57
  text "P5" at 88.2,84.3 h1.57
  text "P6" at 95.9,84.3 h1.57
  text "<>" at 55.8,84 h1.52 r90
  text "<>" at 63.3,84 h1.52 r90
  text "<>" at 70.8,84 h1.52 r90
  text "<>" at 78.4,84 h1.52 r90
  text "<>" at 85.7,84 h1.52 r90
  text "<>" at 93.2,84 h1.52 r90
  text "<>" at 100.8,84 h1.52 r90
  text "┬" at 8.525,1.925 h1.52 r180
  text "┬" at 44.3,1.925 h1.52 r180
  text "P7" at 53,0.6 h1.57
  text "P8" at 60.6,0.6 h1.57
  text "P9" at 67.9,0.6 h1.57
  text "P10" at 75.4,0.6 h1.57
  text "P11" at 82.9,0.6 h1.57
  text "P12" at 90.4,0.6 h1.57
  text "P13" at 97.8,0.6 h1.57
  text "+12   +12 +3.3  +3.3  +5   +5" at 10.05,0.4 h1
  text "<>" at 52.4,0.2 h1.52 r90
  text "<>" at 59.9,0.2 h1.52 r90
  text "<>" at 67.3,0.2 h1.52 r90
  text "<>" at 74.8,0.2 h1.52 r90
  text "<>" at 82.3,0.2 h1.52 r90
  text "<>" at 89.7,0.2 h1.52 r90
  text "<>" at 97.1,0.2 h1.52 r90

## Text inside footprints (layer, text, board x,y; h text height)
P1: Top Overlay "2" at 0.952,82.032 h1.27; Top Overlay "1" at 0.952,79.492 h1.27; Top Overlay "33" at 46.164,79.492 h1.27; Top Overlay "34" at 46.164,82.032 h1.27
P2: Top Overlay "34" at 12.862,21.256 h1.27 r270; Top Overlay "33" at 10.322,21.256 h1.27 r270; Top Overlay "1" at 10.322,66.468 h1.27 r270; Top Overlay "2" at 12.862,66.468 h1.27 r270